# EAGLE board BRD Board G1 v63 (EAGLE 9.7.0), part 1 of 2
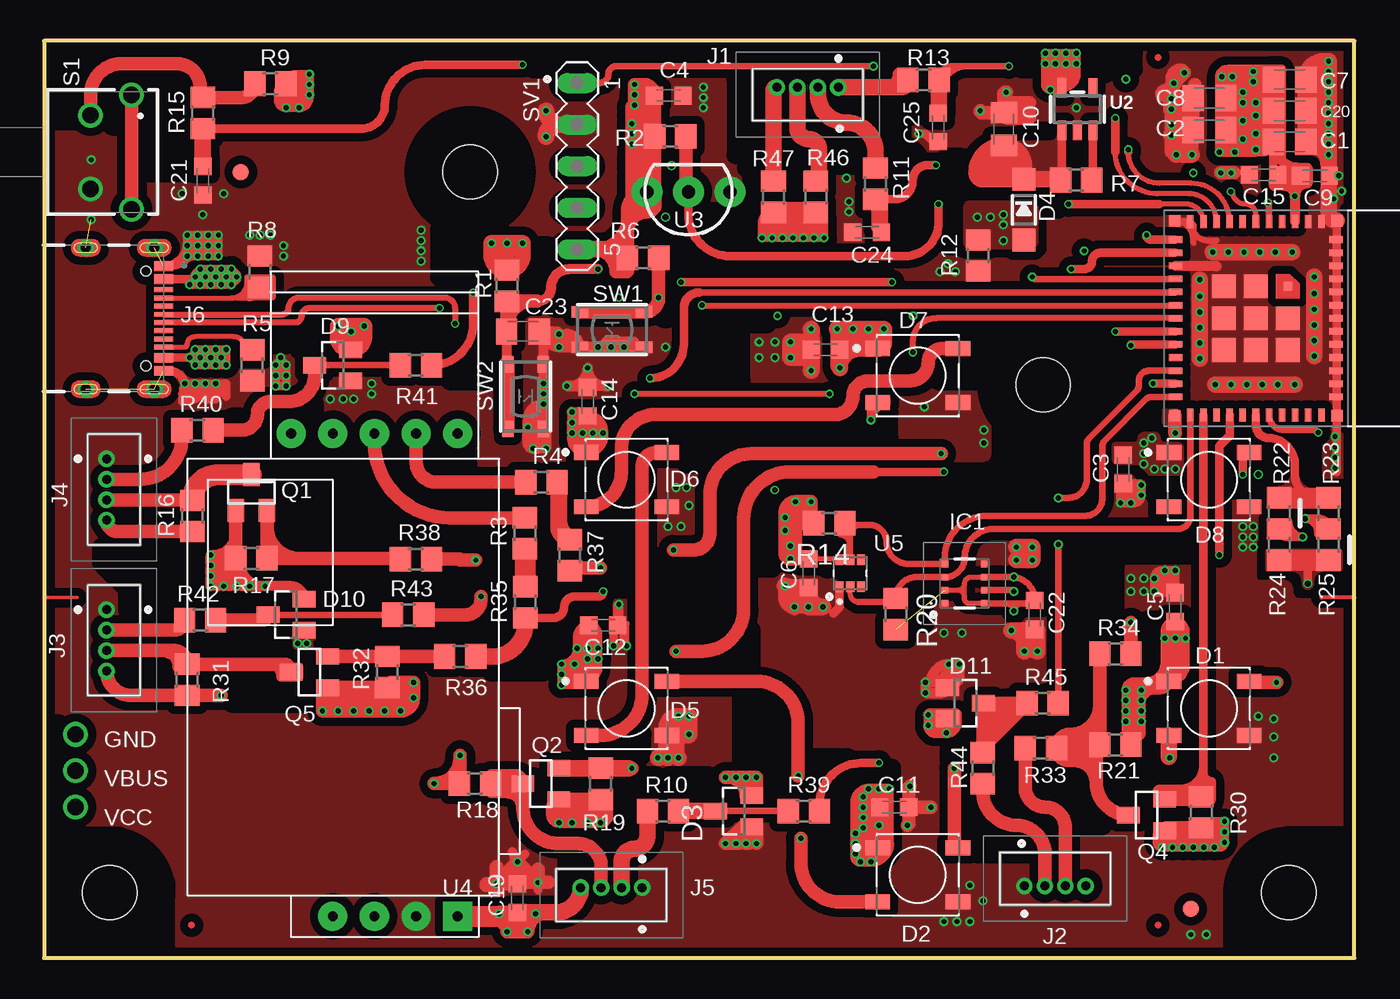
[diagram p0: board, top side]
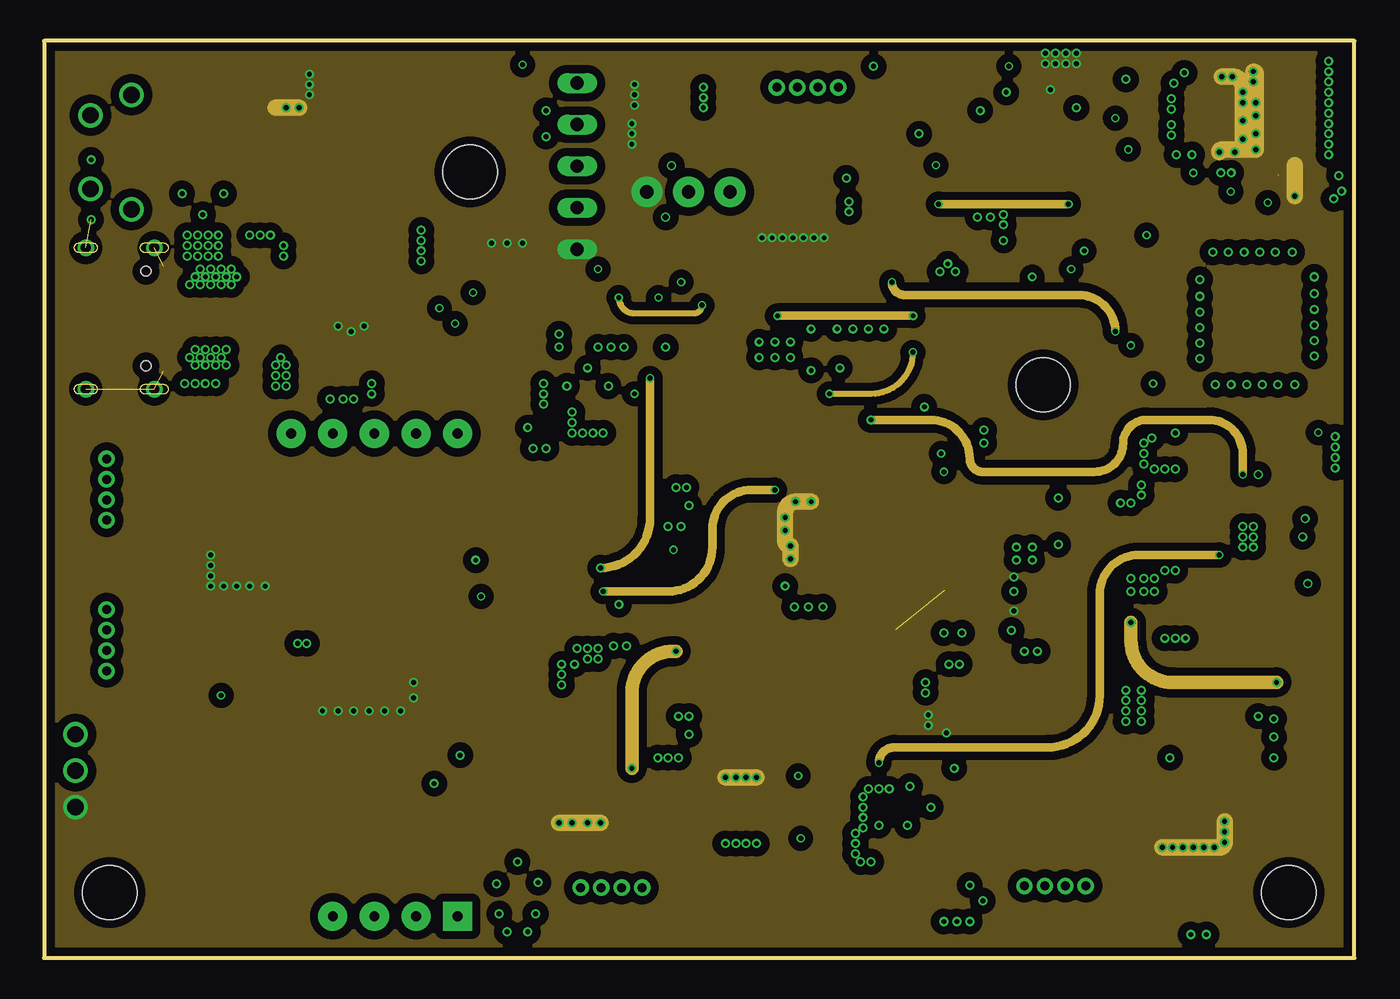
[diagram p1: board, inner layer Route2]
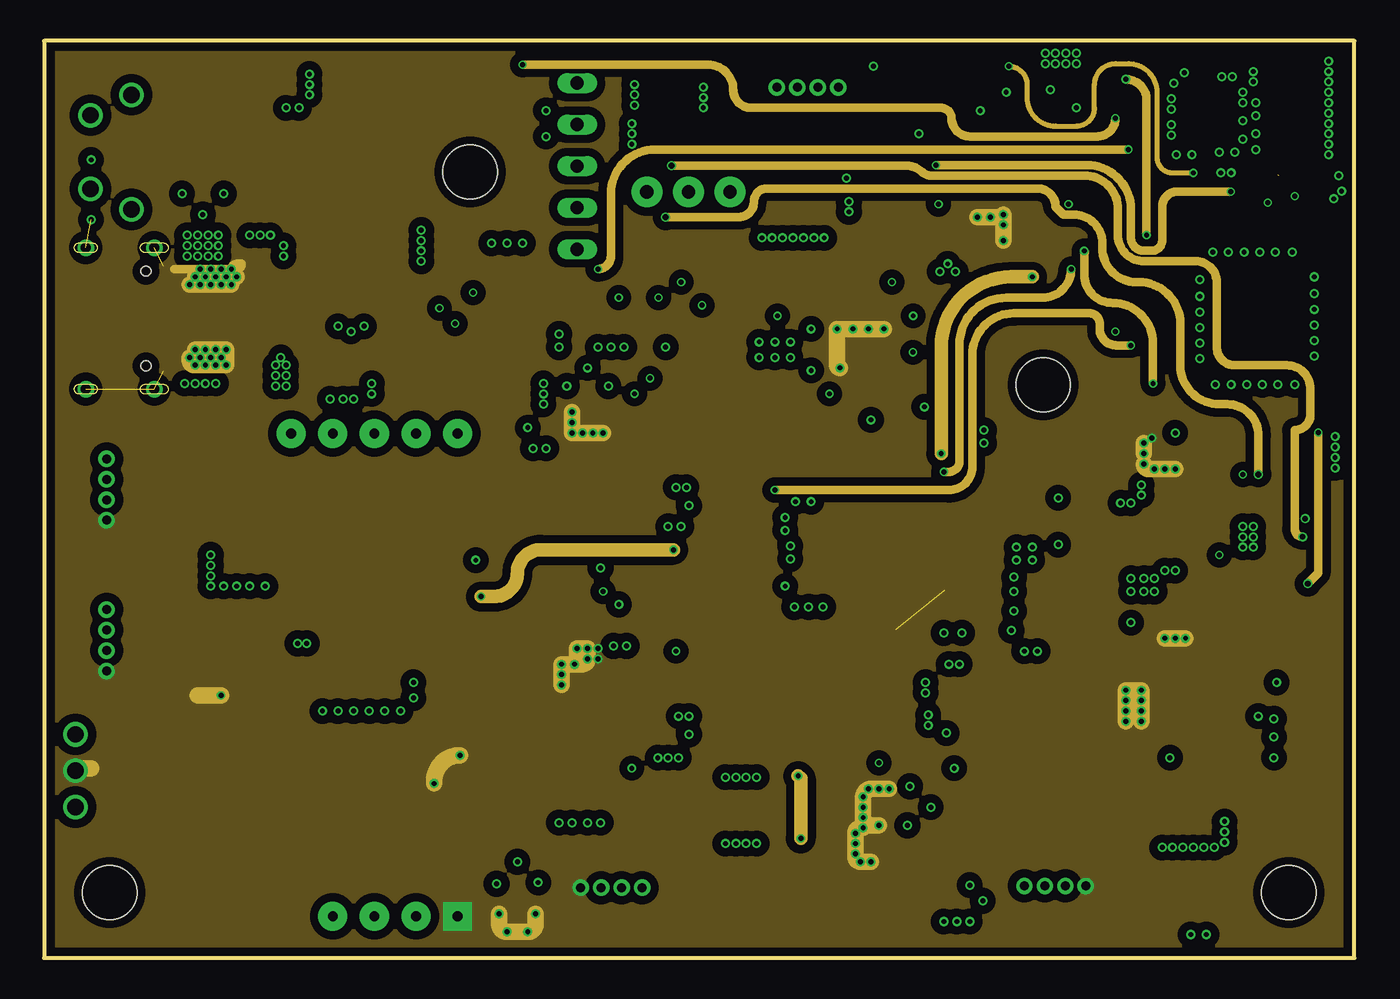
[diagram p2: board, inner layer Route15]
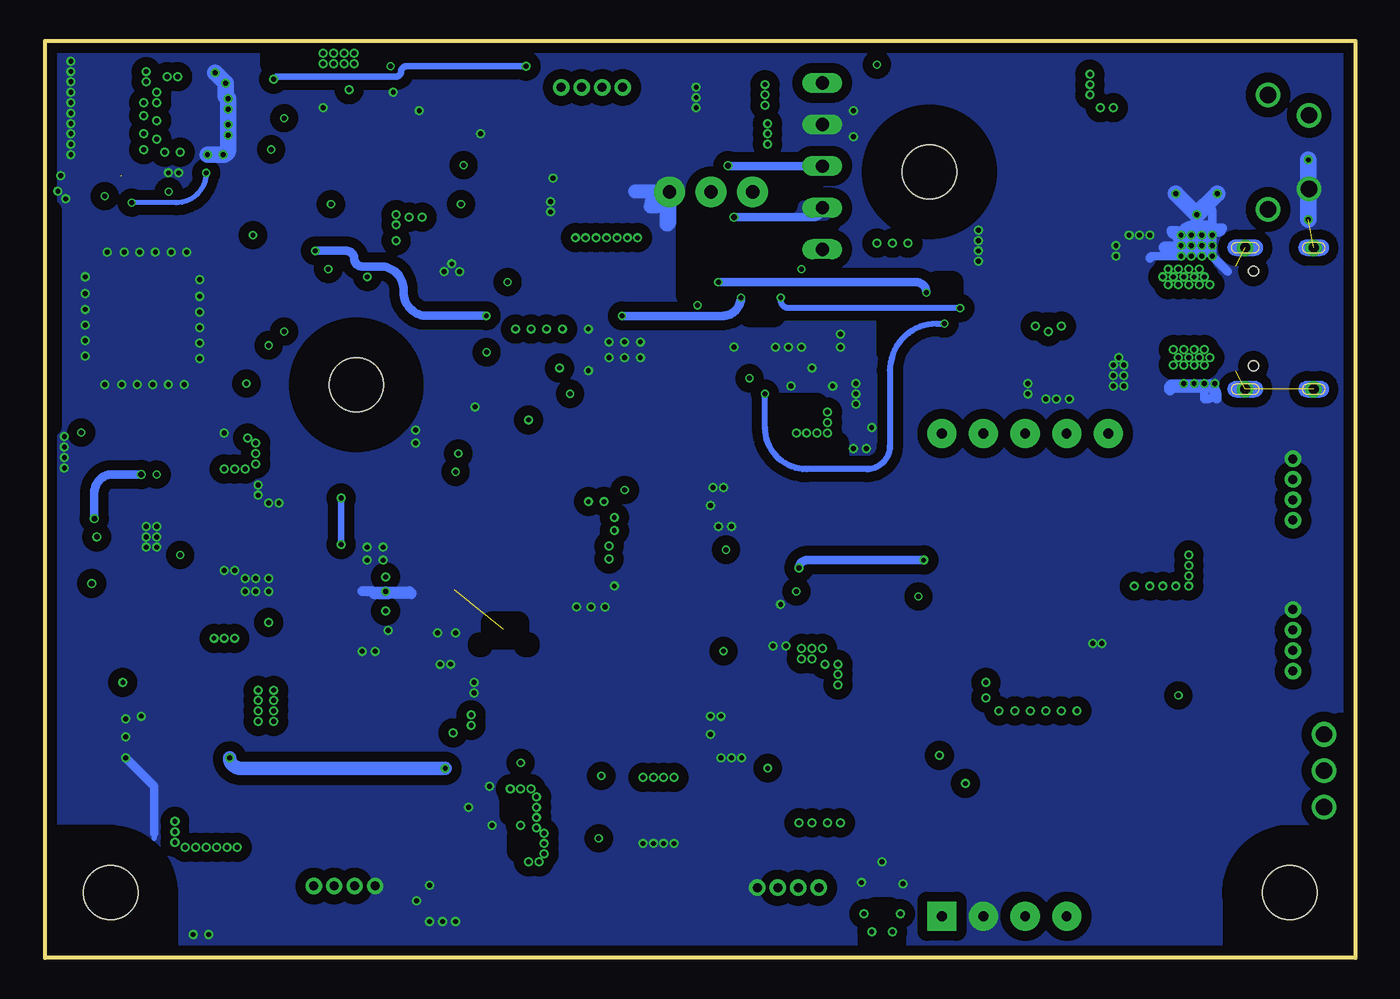
[diagram p3: board, bottom side, seen from below]

Size 80 x 56 mm. Coordinates in mm from the lower left corner, seen from the top.
Outline: 0,0 80,0 80,56 0,56 0,0
Copper layers (1+2*15+16): Top 0.018mm / dielectric 0.36mm / Route2 0.035mm / dielectric 0.71mm / Route15 0.035mm / dielectric 0.2mm / Bottom 0.018mm
Design rules "Multi-CB_4L_100µm-Tracks_OL35µm-IL35µm *": minimum track width 0.1mm, minimum drill 0.2mm, track to track 0.1mm, track to pad 0.1mm, pad to pad 0.1mm, via to via 0.1mm, smd to smd 0mil, copper to edge 0.2mm, drill to drill 0.2mm, minimum pad ring 0.125mm, minimum via ring 0.1mm, stop-mask expansion 2mil, vias tented up to drill 0.45mm, thermal gap 0.2mm
Net classes: 2 gnd: width 0.254 mm, drill 0.483 mm; 3 Power: width 0.305 mm, drill 0.483 mm
Holes 3.3 mm at 26,48 4,4 76,4 61,35
tRestrict: area 59.2,33.2 to 62.8,36.8; area 24.2,46.2 to 27.8,49.8; area 2.2,2.2 to 5.8,5.8; area 74.2,2.2 to 77.8,5.8; area 2.2,2.2 to 5.8,5.8; area 67.8,28.3 to 69.4,29.1; area 0.3,0.3 to 1.6,2.2; area 78.4,0.3 to 79.4,1.6; area 43.5,23.8 to 44.5,27.9; area 29.2,18.1 to 32.1,20.3; area 33,22.5 to 35.9,27.9; area 9.2,18.7 to 11.4,19.4; 87 more areas
bRestrict: area 24.2,46.2 to 27.8,49.8; area 2.2,2.2 to 5.8,5.8; area 59.2,33.2 to 62.8,36.8; area 74.2,2.2 to 77.8,5.8; area 0.3,0.3 to 1.6,2.2; area 78.4,0.3 to 79.4,1.6; area 35.5,39.2 to 37,40.3; area 28.4,37 to 28.6,39.1; area 24.6,40.5 to 25.6,41.3; area 50.8,8.7 to 51.7,9.8; area 50.6,6.5 to 51.1,7.5; area 51.1,19.5 to 52.7,20.5; 17 more areas

## Footprints (pad centres in the part's own frame; a part is rotated, then mirrored left to right if it is on the bottom)
C0805K = smd 1.3 x 1.6: 1 -1,0; 2 1,0
C0603K = smd 1.05 x 1.08: 1 -0.875,0; 2 0.875,0
WS2812B = smd 1.5 x 0.9: 1 -2.45,1.65; 2 -2.45,-1.65; 3 2.45,-1.65; 4 2.45,1.65
SOT23 = smd 1 x 1.4: 1 -0.95,-1.1; 2 0.95,-1.1; 3 0,1.1
SOD-123 = smd 1.4 x 1.4: A 1.85,0; C -1.85,0
BME688 = smd 0.4 x 0.4: 1 1.2,1.2; 2 1.2,0.4; 3 1.2,-0.4; 4 1.2,-1.2; 5 -1.2,-1.2; 6 -1.2,-0.4; 7 -1.2,0.4; 8 -1.2,1.2
530470410 = drill 0.55 pad 1: 1 0,0; 2 -1.25,0; 3 -2.5,0; 4 -3.75,0
GCT_USB4105-GF-A = smd 0.6 x 1.15: A1_B12 -3.2,4.755; A4_B9 -2.4,4.755; B1_A12 3.2,4.755; B4_A9 2.4,4.755 | smd 0.3 x 1.15: A5 -1.25,4.755; A6 -0.25,4.755; A7 0.25,4.755; A8 1.25,4.755; B5 1.75,4.755; B6 0.75,4.755; B7 -0.75,4.755; B8 -1.75,4.755 | drill 0.6 pad 1: SH1 -4.32,4.18; SH2 4.32,4.18; SH3 -4.32,0; SH4 4.32,0 | hole 0.6: 2.89,3.68; -2.89,3.68
R0805 = smd 1.3 x 1.5: 1 -0.95,0; 2 0.95,0
FIDU_1_3MM = smd 1 x 1: P$1 0,0
4312560587X6 = drill 1: 1 -3.5,1.25; 2 -2.25,-1.25; 3 2.25,-1.25; 4 3.5,1.25
MAR05-1 = drill 0.813 long: 1 -5.08,0; 2 -2.54,0; 3 0,0; 4 2.54,0; 5 5.08,0
BTN_RKB2_4.6X2.8 = smd 1 x 0.7: A 1.973,1.075; A' -1.973,1.075; B 1.973,-1.075; B' -1.973,-1.075
ESP32-PICO-MINI = smd 0.8 x 0.4: 1 -5.9,4; 2 -5.9,3.2; 3 -5.9,2.4; 4 -5.9,1.6; 5 -5.9,0.8; 6 -5.9,0; 7 -5.9,-0.8; 8 -5.9,-1.6; 9 -5.9,-2.4; 10 -5.9,-3.2; 11 -5.9,-4; 25 5.9,-4; 26 5.9,-3.2; 27 5.9,-2.4; 28 5.9,-1.6; 29 5.9,-0.8; 30 5.9,0; 31 5.9,0.8; 32 5.9,1.6; 33 5.9,2.4; 34 5.9,3.2; 35 5.9,4 | smd 0.4 x 0.8: 12 -4.8,-4.9; 13 -4,-4.9; 14 -3.2,-4.9; 15 -2.4,-4.9; 16 -1.6,-4.9; 17 -0.8,-4.9; 18 0,-4.9; 19 0.8,-4.9; 20 1.6,-4.9; 21 2.4,-4.9; 22 3.2,-4.9; 23 4,-4.9; 24 4.8,-4.9; 36 4.8,4.9; 37 4,4.9; 38 3.2,4.9; 39 2.4,4.9; 40 1.6,4.9; 41 0.8,4.9; 42 0,4.9; 43 -0.8,4.9; 44 -1.6,4.9; 45 -2.4,4.9; 46 -3.2,4.9; 47 -4,4.9; 48 -4.8,4.9 | smd 1.45 x 1.45: 49 0,0; 54 -1.95,0; 55 -1.95,-1.95; 56 0,-1.95; 57 1.95,-1.95; 58 1.95,0; 59 1.95,1.95; 60 0,1.95 | smd 0.7 x 0.7: 50 5.95,4.95; 51 5.95,-4.95; 52 -5.95,-4.95; 53 -5.95,4.95 | smd 0.5 x 0.5: 61 -1.95,1.95
SOT23-5 = smd 0.55 x 1.2: 1 -0.95,-1.3; 2 0,-1.3; 3 0.95,-1.3; 4 0.95,1.3; 5 -0.95,1.3
TO-92-AMMO = drill 0.813 pad 1.88: 1 -2.54,0; 2 0,0; 3 2.54,0
MH-Z19B = drill 0.6 pad 1.778: AOT 0,5.08; GND 0,2.54; HD 29.489,10.16; PWM 0,7.62; RX 29.489,2.54; SR 29.489,7.62; TX 29.489,5.08; VO 29.489,0 | drill 0.6 pad 1.778 square: VIN 0,0
XDCR_VEML6035 = smd 0.65 x 0.5: 1 -0.825,0.65; 2 -0.825,0; 3 -0.825,-0.65; 4 0.825,-0.65; 5 0.825,0; 6 0.825,0.65

## Placement (x,y rotation side)
C1  10uF  [C0805K]  76.04,49.83 0 top
C2  10uF  [C0805K]  71.15,50.55 180 top
C3  100nF  [C0603K]  65.88,29.83 270 top
C4  100nF  [C0603K]  38.13,52.66 180 top
C5  100nF  [C0603K]  69.06,21.43 90 top
C6  100nF  [C0603K]  46.67,23.5 270 top
C7  10uF  [C0805K]  76.04,53.64 0 top
C8  10uF  [C0805K]  71.15,52.5 180 top
C9  100nF  [C0603K]  77.58,47.77 0 top
C10  10uF  [C0805K]  58.59,50.62 90 top
C11  100nF  [C0603K]  51.91,9.21 0 top
C12  100nF  [C0603K]  34.13,20.32 0 top
C13  100nF  [C0603K]  47.72,37.15 180 top
C14  100nF  [C0603K]  33.18,33.97 90 top
C15  1uF  [C0603K]  74.46,47.81 180 top
C19  100nF  [C0603K]  28.89,3.65 90 top
C20  10uF  [C0805K]  76.04,51.73 0 top
C21  100nF  [C0603K]  9.68,47.47 270 top
C22  100nF  [C0603K]  60.48,20.95 90 top
C23  1uF  [C0805K]  29.23,38.26 0 top
C24  100nF  [C0603K]  50.24,44.31 180 top
C25  100nF  [C0603K]  54.58,50.72 270 top
D1  WS2812B  [WS2812B]  71.12,15.24 0 top
D2  WS2812B  [WS2812B]  53.34,5.08 0 top
D3  BAS40-04  [SOT23]  42.1,8.97 90 top
D4  MBR540  [SOD-123]  59.81,45.69 270 top
D5  WS2812B  [WS2812B]  35.56,15.24 0 top
D6  WS2812B  [WS2812B]  35.56,29.21 0 top
D7  WS2812B  [WS2812B]  53.34,35.56 0 top
D8  WS2812B  [WS2812B]  71.12,29.21 0 top
D9  BAS40-04  [SOT23]  17.62,36.2 90 top
D10  BAS40-04  [SOT23]  14.76,20.95 90 top
D11  BAS40-04  [SOT23]  56.24,15.56 270 top
IC1  BME688  [BME688]  56.2,22.86 180 top
J1  53047-0410  [530470410]  48.48,53.16 0 top
J2  53047-0410  [530470410]  59.85,4.4 180 top
J3  53047-0410  [530470410]  3.81,21.27 90 top
J4  53047-0410  [530470410]  3.81,30.48 90 top
J5  53047-0410  [530470410]  36.51,4.29 0 top
J6  USB4105-GF-A  [GCT_USB4105-GF-A]  2.54,39.05 270 top
Q1  BSS138  [SOT23]  12.65,28.42 0 top
Q2  BSS138  [SOT23]  30.32,10.64 90 top
Q4  BSS138  [SOT23]  67.31,8.73 90 top
Q5  BSS138  [SOT23]  16.19,17.46 90 top
R1  5.1K  [R0805]  28.26,41.05 90 top
R2  4k7  [R0805]  38.23,50.16 180 top
R3  330  [R0805]  29.35,25.93 90 top
R4  330  [R0805]  30.36,29.05 180 top
R5  5.1K  [R0805]  12.7,36.2 90 top
R6  100K  [R0805]  36.57,42.75 180 top
R7  100K  [R0805]  63.01,47.5 180 top
R8  5.1K  [R0805]  13.18,41.91 270 top
R9  10k  [R0805]  13.81,53.39 0 top
R10  1k  [R0805]  37.78,8.97 180 top
R11  100k  [R0805]  50.76,47.27 270 top
R12  100K  [R0805]  57.02,42.89 90 top
R13  100k  [R0805]  53.69,53.61 0 top
R14  4k7  [R0805]  47.94,26.55 180 top
R15  100k  [R0805]  9.68,51.59 90 top
R16  10k  [R0805]  9.05,26.99 270 top
R17  10k  [R0805]  12.65,24.4 180 top
R18  10k  [R0805]  26.3,10.65 180 top
R19  10k  [R0805]  33.97,10.64 270 top
R20  4k7  [R0805]  52,21 270 top
R21  10k  [R0805]  65.41,13.02 0 top
R22  !0  [R0805]  75.41,27.15 90 top
R23  0  [R0805]  78.42,27.15 270 top
R24  0  [R0805]  75.41,25.24 270 top
R25  !0  [R0805]  78.42,25.24 90 top
R30  10k  [R0805]  70.64,8.89 270 top
R31  10k  [R0805]  8.73,16.99 270 top
R32  10k  [R0805]  20.95,17.46 270 top
R33  0  [R0805]  60.85,12.81 180 top
R34  0  [R0805]  65.41,18.57 180 top
R35  0  [R0805]  29.37,21.72 90 top
R36  0  [R0805]  25.4,18.41 180 top
R37  0  [R0805]  32.09,24.59 90 top
R38  0  [R0805]  22.7,24.35 180 top
R39  330  [R0805]  46.39,8.97 180 top
R40  1k  [R0805]  9.37,32.23 180 top
R41  330  [R0805]  22.7,36.2 180 top
R42  1k  [R0805]  9.53,20.64 180 top
R43  330  [R0805]  22.23,20.95 180 top
R44  1k  [R0805]  57.31,11.59 270 top
R45  330  [R0805]  60.96,15.56 180 top
R46  10k  [R0805]  47.12,46.48 270 top
R47  10k  [R0805]  44.53,46.48 270 top
REF1  FIDUCIALFIDU_1_3_MM  [FIDU_1_3MM]  12,48 0 top
REF2  FIDUCIALFIDU_1_3_MM  [FIDU_1_3MM]  70,3 90 top
S1  431256058726  [4312560587X6]  4.08,49.21 270 top
SV1  THT Pin Header 5*1  [MAR05-1]  32.54,48.35 270 top
SW1  KMR2  [BTN_RKB2_4.6X2.8]  34.67,38.37 180 top
SW2  KMR2  [BTN_RKB2_4.6X2.8]  29.39,34.29 270 top
U1  ESP32-C6-MINI_MINI  [ESP32-PICO-MINI]  73.98,39.06 270 top
U2  AP2112/RT9080-3.3  [SOT23-5]  63.08,51.83 0 top
U3  DS18B20  [TO-92-AMMO]  39.34,46.78 180 top
U4  MH-Z19B  [MH-Z19B]  25.24,2.54 90 top
U5  VEML6035  [XDCR_VEML6035]  49.21,23.5 90 top

## Library data of the parts
C1-C15 C19-C25 = rcl; SPICEPREFIX: C
D1 D2 D5-D8 = LED; CATEGORY: LED; COLOR: RGB; DATASHEET: https://cdn-shop.adafruit.com/datasheets/WS2812B.pdf; DESCRIPTION: LED integrated light source; MANUFACTURER: Worldsemi; MPN: WS2812B; OPERATING_TEMPERATURE: -55°C ~ 150°C; PACKAGE_SIZE: 5050; PACKAGE_TYPE: SMD; PART_STATUS: ACTIVE; ROHS: COMPLIANT; SERIES: WS2812B; SUBCATEGORY: Chip LED Addressable; TYPE: Square with Flat Top
D3 D9-D11 = diode
D4 = microbuilder
IC1 = BME688; DESCRIPTION: Gas sensor measuring relative humidity, barometric pressure, ambient temperature and gas (VOC); HEIGHT: 1mm; MANUFACTURER_NAME: BOSCH; MANUFACTURER_PART_NUMBER: BME688; MOUSER_PART_NUMBER: 262-BME688; MOUSER_PRICE-STOCK: https://www.mouser.co.uk/ProductDetail/Bosch-Sensortec/BME688?qs=IS%252B4QmGtzzqQoVDscqwx3A%3D%3D
J1-J5 = 53047-0410; DESCRIPTION: Headers & Wire Housings VERTICAL HDR 4P; HEIGHT: 4.4mm; MANUFACTURER_NAME: Molex; MANUFACTURER_PART_NUMBER: 53047-0410; MOUSER_PART_NUMBER: 538-53047-0410; MOUSER_PRICE-STOCK: https://www.mouser.co.uk/ProductDetail/Molex/53047-0410?qs=DcEdecHHM4i8IPBxVAuJtg%3D%3D
J6 = USB4105-GF-A; AVAILABILITY: In Stock; CHECK_PRICES: https://www.snapeda.com/parts/USB4105-GF-A/Global+Connector+Technology/view-part/?ref=eda; DESCRIPTION: USB-C (USB TYPE-C) USB 2.0 Receptacle Connector 24 (16+8 Dummy) Position Surface Mount, Right Angle; Through Hole; MF: GCT; MP: USB4105-GF-A; PACKAGE: None; PRICE: None; SNAPEDA_LINK: https://www.snapeda.com/parts/USB4105-GF-A/Global+Connector+Technology/view-part/?ref=snap
Q1 Q2 Q4 Q5 = BeagleBone_Blue_R3; PROD_ID: TRANS-00830
R1-R25 R30-R47 = rcl; SPICEPREFIX: R
REF1 REF2 = Fiducial_Infolog
S1 = 431256058726; AVAILABILITY: In Stock; CHECK_PRICES: https://www.snapeda.com/parts/431256058716/W%25C3%25BCrth+Elektronik+Midcom/view-part/?ref=eda; DESCRIPTION: Tactile Switch SPST-NO Side Actuated Through Hole, Right Angle; MF: Würth Elektronik; MP: 431256058716; PACKAGE: None; PRICE: None; SNAPEDA_LINK: https://www.snapeda.com/parts/431256058716/W%25C3%25BCrth+Elektronik+Midcom/view-part/?ref=snap
SV1 = con-lstb; OC_FARNELL: unknown; OC_NEWARK: unknown
SW1 SW2 = adafruit_electromech
U1 = adafruit_wireless
U2 = adafruit_power; JLC_ROTATION: 0
U3 = SparkFun-Sensors; STORE_ID: SEN-00245
U4 = MH-Z19B; AVAILABILITY: Not in stock; CHECK_PRICES: https://www.snapeda.com/parts/MH-Z19B/Winsen/view-part/?ref=eda; DESCRIPTION: Intelligent Infrared CO2 Module; MF: Winsen; MP: MH-Z19B; PACKAGE: Package; PRICE: None; SNAPEDA_LINK: https://www.snapeda.com/parts/MH-Z19B/Winsen/view-part/?ref=snap
U5 = VEML6035; AVAILABILITY: In Stock; CHECK_PRICES: https://www.snapeda.com/parts/VEML6035/Vishay/view-part/?ref=eda; DESCRIPTION: Optical Sensor Ambient - I²C 6-SMD, No Lead; MF: Vishay Semiconductor Opto Division; MP: VEML6035; PACKAGE: SMD-6 Vishay Semiconductor Opto Division; PRICE: None; SNAPEDA_LINK: https://www.snapeda.com/parts/VEML6035/Vishay/view-part/?ref=snap

## Nets
ALL1-DIN-TRIGGER1: Q4.2 R30.1 U1.26
ALL2-RX-TRIGGER2: R35.1 R36.1 U1.20
ALL3-TX-TRIGGER3: R37.1 R38.1 U1.16
BOOT: R6.1 SW1.B SW1.B' U1.23
D+: J6.A6 U1.18
D-: J6.A7 U1.17
DATA-TEMP: R2.1 U1.10 U3.2
DIN1: D1.2 D2.4
DIN2: D2.2 D5.4
DIN3: D5.2 D6.4
DIN4: D6.2 D7.4
DIN5: D7.2 D8.4
EN: R7.1 U2.3
GND: C1.2 C2.2 C3.2 C4.1 C5.2 C6.2 C7.2 C8.2 C9.2 C10.2 C11.2 C12.2 C13.2 C14.2 C15.2 C19.2 C20.2 C21.2 C22.1 C23.2 C24.2 C25.2 D1.3 D2.3 D3.1 D5.3 D6.3 D7.3 D8.3 D9.1 D10.1 D11.1 IC1.1 IC1.5 IC1.7 J2.1 J3.1 J4.1 J5.1 J6.A1_B12 J6.B1_A12 J6.SH1 J6.SH2 J6.SH3 J6.SH4 R5.1 R8.1 R12.1 S1.3 SV1.2 SW1.A SW1.A' SW2.A SW2.A' U1.1 U1.2 U1.11 U1.14 U1.36 U1.37 U1.38 U1.39 U1.40 U1.41 U1.42 U1.43 U1.44 U1.45 U1.46 U1.47 U1.48 U1.49 U1.50 U1.51 U1.52 U1.53 U1.54 U1.55 U1.56 U1.57 U1.58 U1.59 U1.60 U1.61 U2.2 U3.1 U4.GND U5.1
HIGH-1-ECHO: J2.2 R44.2
HIGH-2-ECHO: J3.2 R42.2
HIGH-3-ECHO: J4.2 R40.2
HIGH-4-ECHO: J5.2 R10.2
IO0: SV1.1 U1.12
IO27: U1.27
IO29: U1.29
LED-DATA: D1.4 R34.1
LOW-1-ECHO: R45.1 U1.22
LOW-2-ECHO: R43.1 U1.15
LOW-3-ECHO: R41.1 U1.19
LOW-4-ECHO: R39.1 U1.28
N$1: R4.2 U4.RX
N$2: R9.1 R15.2 S1.2
N$3: R3.2 U4.TX
N$4: S1.1 S1.4
N$5: D3.3 R10.1 R39.2
N$6: D9.3 R40.1 R41.2
N$7: Q1.2 R17.1 R38.2
N$8: J6.A5 R8.2
N$9: J6.B5 R5.2
N$10: D10.3 R42.1 R43.2
N$11: D11.3 R44.1 R45.2
N$12: J1.3 R46.1
N$13: J1.4 R47.1
N$15: Q5.2 R32.1 R36.2
N$16: Q4.3 R21.1 R33.1 R34.2
N$17: J1.2 R11.1
N$19: J1.1 R13.1
REGENSENSOR-1: C24.1 R11.2 U1.6
REGENSENSOR-2: C25.1 R13.2 U1.5
RESET: C23.1 R1.1 SW2.B SW2.B' U1.8
RX: R22.2 R23.1 U1.30
RX-CO2: R4.1 R37.2
RX-VER: R23.2 R25.2 SV1.4
SCK: IC1.4 R14.1 U1.24 U5.5
SDI: IC1.3 R20.1 U1.25 U5.2
TASTER: C21.1 R15.1 U1.9
TRIG-1: J2.3 R33.2
TRIG-2: J3.3 Q5.3 R31.1
TRIG-3: J4.3 Q1.3 R16.1
TRIG-4: J5.3 Q2.3 R18.1
TRIGGER-4-3V3: Q2.2 R19.1 U1.13
TX: R24.2 R25.1 U1.31
TX-CO2: R3.1 R35.2
TX-VER: R22.1 R24.1 SV1.3
VBUS: C3.1 C5.1 C11.1 C12.1 C13.1 C14.1 C19.1 D1.1 D2.1 D4.A D5.1 D6.1 D7.1 D8.1 J2.4 J3.4 J4.4 J5.4 J6.A4_B9 J6.B4_A9 R12.2 R16.2 R18.2 R21.2 R31.2 U4.VIN
VCC: C1.1 C2.1 C4.2 C6.1 C7.1 C8.1 C9.1 C15.1 C20.1 C22.2 D3.2 D9.2 D10.2 D11.2 IC1.2 IC1.6 IC1.8 Q1.1 Q2.1 Q4.1 Q5.1 R1.2 R2.2 R6.2 R9.2 R14.2 R17.2 R19.2 R20.2 R30.2 R32.2 R46.2 R47.2 SV1.5 U1.3 U2.5 U3.3 U5.6
VHI: C10.1 D4.C R7.2 U2.1

## Tracks (layer width: path | path; a pad name or v marks a point on that pad's centre or on a via)
ALL1-DIN-TRIGGER1
  Top 0.508: U1.26 70.78,11.75 | 70.78,11.29 70.78,10.79 | 70.78,10.79 70.78,9.98 R30.1 69.83,9.84 | 70.78,11.75 arc-90 69.35,10.32 | Q4.2 arc-90 67.94,10.15 67.94,10.16 arc-90 68.1,10.32 69.35,10.32 | 69.69,9.68 arc-90 69.35,10.02 69.35,10.32 | 69.83,9.84 arc-90 69.35,10.32 | 69.83,9.84 arc-90 69.35,10.32 | 70.78,10.79 70.3,10.32 69.35,10.32 | 70.78,11.75 70.78,11.29 | 70.78,11.29 arc90 71.28,10.79 71.28,9.68 arc-90 71.12,9.53
  Top 0.813: Q4.2 69.69,9.68 70.48,9.68 arc90 R30.1
ALL2-RX-TRIGGER2  (via drill 0.3)
  Top 0.508: R35.1 31.09,20.77 arc90 31.75,21.43 arc-90 32.38,22.07 33.81,22.07 arc90 v34.13,22.38 | U1.20 66.36,37.47 v66.36,37.41
  Top 1.016: R36.1 27.6,18.41 arc90 R35.1
  Route2 0.508: v34.13,22.38 38.1,22.38 arc90 40.8,25.08 40.8,26.19 arc-90 43.18,28.57 v44.61,28.57
  Route15 0.508: v66.36,37.41 65.46,37.41 arc-90 64.45,38.42 64.45,38.73 arc90 63.82,39.37 59.21,39.37 arc90 56.67,36.83 56.67,30 arc-90 55.24,28.57 v44.61,28.57
ALL3-TX-TRIGGER3  (via drill 0.3, 0.3 pad 0.55)
  Top 0.406: U1.16 69.06,40.64 40.01,40.64
  Top 0.508: 40.01,40.64 arc90 39.05,39.69 39.05,37.47 arc-90 v36.99,35.4
  Top 0.813: R38.1 25.34,24.35 arc-90 25.4,24.29 v26.35,24.29 | R37.1 arc-90 32.26,23.81 v33.97,23.81
  Route2 0.508: v36.99,35.4 36.99,26.83 arc-90 v33.97,23.81
  Bottom 0.508: v26.35,24.29 33.5,24.29 arc-90 v33.97,23.81
BOOT  (via drill 0.3)
  Top 0.508: U1.23 67.73,35.06 arc90 v67.71,35.08
  Top 0.813: SW1.B SW1.B' arc90 v37.52,40.32 R6.1
  Route2 0.508: v53.06,39.21 v44.77,39.21 arc90 v44.77,39.21
  Route15 0.508: v67.71,35.08 67.71,37.54 arc90 65.25,40.01 arc-90 63.5,41.75 63.5,43.02 arc90 v63.5,43.18
  Bottom 0.508: v37.52,40.32 arc90 38.62,39.21 v44.77,39.21 | v53.06,39.21 56.67,39.21 arc90 58.1,40.64 58.1,40.8 arc-90 59.53,42.23 60.64,42.23 arc90 61.12,42.7 arc-90 61.59,43.18 v63.5,43.18
D+  (via drill 0.3)
  Top 0.356: U1.18 54.46,39.06 arc90 53.02,37.62 53.02,36.99 | v47.94,34.45 v36.04,34.45 | v25.08,38.73 25.08,39.69 arc90 24.45,40.32 15.56,40.32 arc90 14.92,39.69 arc-90 14.54,39.3 J6.A6
  Top 0.406: 53.02,36.99 v53.04,36.99
  Route2 0.356: v53.04,36.99 arc-90 50.5,34.45 v47.94,34.45
  Bottom 0.356: v25.08,38.73 25.56,38.73 arc-90 28.42,35.88 28.42,31.27 arc90 29.84,29.84 33.5,29.84 arc90 36.04,32.38 v36.04,34.45
D-  (via drill 0.3)
  Top 0.356: v40.16,39.85 40.32,39.85 69.06,39.85 arc90 U1.17 | v24.13,39.69 16.19,39.69 arc90 15.72,39.21 arc-90 15.31,38.8 J6.A7
  Route2 0.356: v35.08,40.32 arc90 36.04,39.37 39.69,39.37 arc90 40.16,39.85 v40.16,39.85
  Bottom 0.305: 35.08,40.16 v35.08,40.32
  Bottom 0.356: 35.08,40.16 arc-90 34.61,39.69 v24.13,39.69
DATA-TEMP  (via drill 0.3)
  Top 0.305: U1.10 arc90 69.71,46.04 68.1,46.04
  Top 0.508: 68.1,46.04 v62.55,46.04 | v54.61,46.04 54.61,44.93 arc-90 52.55,42.86 41.88,42.86 arc-90 39.34,45.4 U3.2
  Top 0.813: U3.2 arc-90 39.18,46.95 R2.1
  Route2 0.508: v54.61,46.04 v62.55,46.04
DIN1  (via drill 0.3 pad 0.55)
  Top 0.813: 68.67,12.29 arc90 v68.74,12.22 | v55.56,11.59 55.56,6.96 arc90 D2.4
  Top 1.016: D1.2 68.67,12.29
  Bottom 0.813: v55.56,11.59 68.1,11.59 arc90 v68.74,12.22
DIN2  (via drill 0.3)
  Top 0.813: D5.4 43.5,16.89 arc-90 46.04,14.35 v46.04,11.11 | v46.2,7.3 46.2,5.81 arc90 48.58,3.43 D2.2
  Route15 0.813: v46.04,11.11 46.2,10.95 v46.2,7.3
DIN3
  Top 0.813: D6.4 37.37,30.86 arc90 36.51,30 36.51,16.13 arc-90 33.97,13.59 D5.2
DIN4
  Top 0.813: D6.2 D6.2 arc90 35.24,29.69 35.24,31.11 arc-90 37.31,33.18 48.26,33.18 arc90 49.37,34.29 arc-90 50.32,35.24 52.86,35.24 arc90 53.98,36.35 arc-90 54.83,37.21 D7.4
DIN5  (via drill 0.3, 0.3 pad 0.55)
  Top 0.356: 50.48,33.5 arc-90 D7.2
  Top 0.508: D7.2 arc-90 51.11,34.13 51.44,34.13 51.44,33.81 arc90 v50.48,32.86 50.48,33.5 | v73.18,29.53 73.18,30.16 73.18,30.47 arc-90 D8.4
  Route2 0.508: v73.18,29.53 73.18,30.8 arc90 71.12,32.86 67.31,32.86 arc90 65.88,31.43 arc-90 64.14,29.69 57.31,29.69 arc-90 56.52,30.48 arc90 54.13,32.86 v50.48,32.86
EN
  Top 0.508: U2.3 64.03,48.9 64.03,47.56 arc-90 R7.1
GND  (via drill 0.3 pad 0.55)  (4 unrouted)
  Top 0.356: 35.08,20.4 35.56,20.4 v35.56,19.05 v34.77,19.05 | U1.11 69.98,45.02 U1.52 arc-90 70.17,43.88 | U1.11 70.17,44.78 70.17,43.88 | 70.17,43.66 70.17,43.88 | U1.11 arc90 71.13,43.81 71.6,43.81
  Top 0.406: 8.41,34.79 8.41,34.45 8.41,34.13 8.41,33.97 | IC1.7 59.14,22.46 arc-90 v59.21,22.38
  Top 0.508: v8.73,44.13 8.73,43.18 | 8.73,43.18 v8.73,42.86 v9.37,42.86 | v9.37,44.13 v9.37,42.86 | v10,44.13 v10,42.86 | 10.64,43.66 v10.64,44.13 v9.37,44.13 | 10.64,43.66 10.64,43.18 | 10.64,43.18 v10.64,42.86 v10,42.86 | v8.73,44.13 v9.37,44.13 | v8.73,43.5 8.89,43.66 10.64,43.66 | 8.73,43.18 10.64,43.18 | v66.36,27.78 v65.72,27.78 65.72,28.8 arc-90 C3.2 | v66.99,28.26 v66.99,28.89 arc90 66.93,28.96 C3.2 | v66.36,27.78 66.52,27.78 | 66.52,27.78 arc90 v66.99,28.26 | v66.36,27.78 arc-90 65.88,28.26 C3.2 | C3.2 66.29,28.96 arc-90 v66.99,28.26 | C3.2 arc-90 66.52,28.32 66.52,27.78 | C3.2 arc-90 66.36,28.48 v66.36,27.78 | v30.16,4.6 30.16,4.13 | 28.57,6.51 28.65,6.43 28.65,6.11 v28.89,5.87 | v28.89,5.87 29.21,6.19 | 29.21,6.19 29.37,6.35 | v28.89,5.87 arc-90 29.21,6.19 | v27.62,4.52 27.62,4.13 arc90 27.78,3.97 | v14.76,35.56 14.76,35.88 | v14.76,35.56 v14.13,35.56 | v14.76,35.56 v14.76,34.92 v14.13,34.92 v14.13,35.56 | v14.13,35.56 14.13,35.88 14.45,35.88 | 14.76,35.88 14.45,35.88 | v14.13,36.2 14.45,35.88 | v14.76,36.2 14.76,35.88 | v14.76,36.2 v14.13,36.2 | v14.76,36.2 14.45,36.51 | 14.45,36.51 v14.45,36.67 | v14.13,36.2 14.45,36.51 | v10.48,35.08 11.11,35.08 11.11,34.29 | v10.48,35.08 10.48,34.92 10.79,34.61 10.48,34.29 10.48,34.13 9.84,34.13 | v10.48,35.08 v9.84,35.08 | v9.84,35.08 10.16,34.77 10.16,34.61 | 9.84,34.13 9.53,34.45 9.21,34.13 | v9.84,35.08 9.53,34.77 | v9.84,35.08 9.84,34.13 | v8.57,35.08 9.21,34.45 | 9.21,34.45 9.21,34.29 | v9.21,35.08 9.21,34.45 | 8.89,34.61 8.57,34.92 | 8.57,34.92 v8.57,35.08 | 8.89,34.61 9.21,34.29 | 9.21,34.29 9.21,34.13 | 8.89,34.61 8.73,34.45 8.41,34.45 | 8.57,34.13 8.41,34.13 | 9.21,34.13 8.57,34.13
  Top 0.508: 8.57,34.13 8.41,33.97 | v8.57,35.08 v9.84,35.08 | 67.79,22.86 v67.79,22.38 arc90 67.86,22.31 | 67.79,22.86 v67.79,23.18 | v67.79,23.18 arc-90 68.26,23.65 v68.42,23.65 | v68.42,23.65 v69.06,23.65 69.06,23.18 | 69.06,23.18 69.06,22.86 | 69.06,22.86 C5.2 68.26,22.31 | 67.86,22.31 68.26,22.31 | v68.42,23.65 68.42,22.46 | 68.42,22.46 arc-90 68.26,22.31 | v67.79,23.18 69.06,23.18 | 67.79,22.86 68.1,22.86 | 69.06,22.86 68.1,22.86 | 68.1,22.86 arc90 67.86,22.62 | 68.1,22.86 arc90 67.86,22.62 | 67.86,22.62 67.86,22.31 | 68.42,22.46 arc-90 68.1,22.78 68.1,22.86 | C12.2 arc90 35.08,20.4 v35.08,21.59 arc90 35.01,21.51 C12.2 | v35.56,19.05 35.4,19.21 35.4,19.84 arc90 35.08,20.16 | v34.77,19.05 34.77,20.08 arc-90 C12.2 | U1.53 U1.50 78.93,29.72 arc-90 78.9,29.69 | C25.2 54.44,49.7 53.82,50.32 v53.42,50.32 | J6.B1_A12 7.64,35.85 arc-90 8.57,34.92 | v9.37,44.13 arc-90 7.49,42.25 J6.A1_B12 arc90 8.73,43.69 v8.73,44.13 | U5.1 48.56,21.42 48.18,21.03 | v10,42.86 v9.37,42.86
  Top 0.61: v30.48,33.81 v30.48,34.45 v30.48,35.08 arc-90 30.47,35.1 SW2.A' 30.47,38.02 arc90 C23.2 30.48,38.26 | v30.48,33.81 30.48,32.86 | 30.48,32.86 SW2.A | SW2.A arc-90 30.64,32.14 30.64,31.91 | 30.64,31.91 30.64,31.59 | 30.64,31.59 v30.64,31.11 v29.84,31.11 | 29.53,31.43 arc90 v29.84,31.11 | 29.53,31.43 29.53,32.07 | 29.53,32.07 v29.53,32.38 | v29.53,32.38 29.53,32.86 | 29.53,32.86 arc-90 v30.48,33.81 | 29.53,32.86 30.48,32.86 | v29.53,32.38 30.16,32.38 | 30.16,32.38 30.42,32.38 arc-90 SW2.A | 29.53,32.07 29.84,32.07 arc90 30.16,32.38 | 29.53,31.43 arc-90 30,31.91 | 30,31.91 30.64,31.91 | v29.84,31.11 30.16,31.11 arc90 30.64,31.59 | v29.84,31.11 arc90 30,31.27 | v29.84,31.11 arc90 30,31.27 | 30,31.27 30,31.91 | 31.27,38.26 arc-90 v31.43,38.1 | 30.96,38.26 31.27,38.26 | v31.43,38.1 arc90 31.27,38.26 | v31.43,38.1 31.43,37.78 | 31.43,37.78 v31.43,37.31 | v31.43,37.31 | v31.43,37.31 arc-90 30.48,38.26 | 30.48,38.26 30.96,38.26 | 30.96,38.26 arc-90 31.43,37.78 | 31.27,38.26 31.27,37.46 arc90 v31.43,37.31 | v31.43,38.1 30.64,38.1 arc-90 30.48,38.26 | v31.43,37.31 31.75,37.31 | 31.75,37.31 32.23,37.31 | 32.23,37.31 32.69,37.31 arc-90 SW1.A | v31.43,38.1 31.89,38.1 | SW1.A arc90 31.89,38.1 | v31.43,38.1 arc-90 32.23,37.31 | 31.89,38.1 arc90 31.75,37.96 31.75,37.31 | SW1.A' 35.41,37.3 arc-90 v35.4,37.31 v34.61,37.31 v33.81,37.31 32.71,37.31 arc90 SW1.A | C14.2 arc-90 33.26,34.92 v34.45,34.92 34.29,34.92 arc-90 v33.18,36.04 | C14.2 v33.18,36.04 | C14.2 arc90 33.1,34.92 v31.91,34.92 32.07,34.92 arc90 v33.18,36.04 | v71.83,47.94 v72.47,47.94 | 54.13,16.83 54.83,16.83 arc-90 D11.1 | D11.1 arc-90 54.83,16.19 v53.82,16.19 v53.82,16.83 54.13,16.83
  Top 0.61: v55.24,17.94 55.24,17.62 | 55.24,17.62 55.24,16.61 | 55.24,16.61 arc-90 D11.1 | 55.88,17.62 v55.88,17.94 v55.24,17.94 | 55.88,17.62 55.88,17.24 | 55.88,17.24 arc-90 55.24,16.61 | 55.88,17.24 55.62,17.24 arc-90 55.24,17.62 | 55.88,17.62 55.24,17.62 | v55.24,17.94 arc-90 54.13,16.83 | v55.24,17.94 arc90 54.13,16.83 | U1.14 71.56,42.27 arc-90 71.6,42.23 | 35.08,37.62 34.29,37.62 | 36.04,37.62 35.24,37.62
  Top 0.813: C10.2 57.29,51.62 arc-90 v57.15,51.75 | C10.2 58.59,51.75 | 58.59,51.75 58.59,52.72 arc-90 v58.74,52.86 | 60.17,51.75 58.59,51.75 | 60.17,52.23 59.07,52.23 arc90 58.59,51.75 | 60.17,51.28 58.93,51.28 arc-90 C10.2 | D3.1 arc-90 42.17,6.99 | 42.17,6.99 v41.59,6.99 42.63,8.02 D3.1 | D3.1 arc-90 42.17,6.99 | D3.1 43.2,7.32 arc-90 v42.86,6.99 | D3.1 43.5,8.02 v43.5,6.99 | v52.7,8.1 52.79,8.18 C11.2 | C11.2 52.79,10.4 v52.86,10.48 | C11.2 v54.13,9.21 | v69.06,32.07 arc-90 69.03,32.09 U1.51 | v28.89,5.87 C19.2 | C19.2 v27.62,4.53 | v27.62,4.53 arc-90 v27.62,4.52 | v30.16,4.6 28.97,4.6 arc90 C19.2 | v27.62,4.52 27.07,4.52 arc90 26.99,4.45 27.54,4.45 arc90 v27.62,4.53 | v27.62,4.52 27.62,5.56 | 30.8,4.6 v30.16,4.6 | 30.16,5.4 v30.16,4.6 | v28.89,5.87 27.62,4.6 v27.62,4.52 | v28.89,5.87 v30.16,4.6 | v71.83,47.94 72.63,47.94 | v69.61,54.05 v68.98,53.42 68.34,52.78 | v68.82,51.83 68.82,51.59 | 68.82,51.59 v68.82,50.88 | v68.82,50.88 v68.82,50.24 | 69.84,50.24 arc90 C2.2 | 70.15,51.59 C8.2 arc90 70.25,52.6 | 70.25,53.34 70.25,52.6 | v68.82,52.47 arc90 68.96,52.6 70.25,52.6 | 68.82,51.59 70.15,51.59 | v68.82,50.88 69.82,50.88 | 69.82,50.88 69.5,51.2 arc90 69.37,51.07 69.37,50.24 | 69.82,50.88 arc-90 C2.2 | v68.82,50.24 69.37,50.24 | 69.37,50.24 69.84,50.24 | 69.84,50.24 arc90 C2.2 | C2.2 70.15,51.59 | v69.14,49.05 arc-90 68.82,49.37 v68.82,50.24 | v69.14,49.05 69.14,49.54 arc-90 69.84,50.24 | v70.09,49.05 70.09,50 arc90 69.84,50.24 | 69.84,50.24 arc90 69.53,49.94 69.53,49.05 v69.14,49.05 | v45.8,21.43 arc-90 45.24,21.99 v45.24,22.7 46.04,22.7 | 46.04,22.7 46.59,22.7 arc-90 C6.2 | v45.8,21.43 arc90 46.67,22.3 arc90 v47.55,21.43 | v45.8,21.43 arc90 46.04,21.67 46.04,22.7
  Top 0.813: v45.8,21.43 v46.67,21.43
  Top 1.016: v30.64,51.75 arc90 31.5,50.89 SV1.2 31.37,50.89 arc90 v30.64,50.16 | 78.42,53.82 78.42,51.73 | 78.42,51.73 78.42,51.12 | 78.42,51.12 78.42,50.35 | 78.42,49.83 78.42,48.45 | 78.42,47.77 C9.2 | 77.81,51.73 78.42,51.73 | C1.2 78.42,49.83 | C1.2 C20.2 | C20.2 C7.2 | C7.2 77.04,53.82 78.42,53.82 | C7.2 arc-90 78.17,54.77 v78.42,54.77 78.42,53.82 | v78.42,49.69 arc-90 77.04,51.07 | C20.2 77.04,51.07 | C20.2 arc-90 78.42,50.35 | 78.42,50.35 78.42,49.83 | C20.2 arc-90 78.42,50.35 | 77.04,51.07 arc90 77.76,50.35 78.23,50.35 | C20.2 arc-90 78.42,50.35 | 77.81,51.73 arc-90 78.42,51.12 | C20.2 77.81,51.73 | 77.81,51.73 arc-90 78.42,51.12 | C20.2 arc-90 77.63,51.15 77.63,50.96 arc90 78.23,50.35 | 78.23,50.35 78.42,50.35 | C7.2 arc-90 77.81,52.88 77.81,51.73 | C1.2 arc-90 78.42,48.45 | 78.42,48.45 78.42,47.77 | U1.53 arc-90 78.42,45.52 78.42,47.77 | v46.83,38.42 arc-90 46.84,38.4 C13.2 | C13.2 46.84,36.67 | 46.84,36.67 46.84,35.89 arc-90 v46.83,35.88 | C13.2 arc90 46.37,37.62 v45.56,37.62 v45.56,36.67 46.84,36.67 | v70.09,49.05 69.53,49.05 | v69.14,49.05 69.14,49.93 arc90 v68.82,50.24 | 68.34,52.78 68.42,52.86 v68.82,52.47 v68.82,51.83 | v68.98,53.42 68.98,53.69 arc-90 69.42,54.13 | v70.56,41.43 v70.56,40.4 v70.56,36.59 | v71.52,35 v76.36,35 | v77.55,36.75 v77.55,41.59 | v76.2,43.1 v71.36,43.1 | v59.85,18.73 59.85,19.21 arc90 v59.05,20 60.41,20 arc90 C22.1 | C22.1 60.48,18.89 arc90 v60.64,18.73 60.64,19.92 arc90 C22.1 | v59.37,25.08 v60.33,25.08 v60.33,24.29 v59.37,24.29 | v45.24,22.7 arc-90 45.8,22.15 v45.8,21.43 | v46.67,21.43 v47.55,21.43 arc-90 46.67,22.3 C6.2 | v38.73,14.76 v39.37,14.76 v39.37,13.65 arc-90 39.31,13.59 38.58,13.59
  Top 1.016: 38.58,13.59 D5.3 | v38.73,14.76 38.73,13.75 arc-90 38.58,13.59 | D5.3 38.01,14.04 arc-90 v38.73,14.76 | D5.3 38.01,12.77 arc-90 v37.47,12.22 | v38.1,12.22 arc-90 38.01,12.31 D5.3 | v38.73,12.22 arc-90 38.58,12.38 38.58,13.59
  Bottom 0.305: 73.34,7.62 73.34,7.3
  Bottom 0.508: v8.73,44.13 v8.73,43.5 | v10.64,43.5 v10,43.5 | v10,43.5 v9.37,43.5 | v9.37,43.5 v8.73,43.5 | v8.73,44.13 9.05,44.13 | 9.05,44.13 v9.37,44.13 | v9.37,44.13 v9.37,43.5 | v9.37,43.5 v9.37,42.86 | v10,43.5 v10,42.86 v10.64,43.5 | v10,43.5 v10,44.13 | v10,44.13 v9.37,44.13 | v8.73,44.13 v9.37,43.5 | v9.37,43.5 v10,44.13 | v10,44.13 v10.64,43.5 | v10,44.13 v10.64,44.13 | v10.64,44.13 10.64,43.81 | v10.64,42.86 v10.64,43.5 | v10,43.5 v9.37,42.86 | v9.37,42.86 v8.73,43.5 | v8.73,43.5 v8.73,42.86 7.78,41.91 | v10,44.13 9.68,44.45 v9.68,45.4 | v8.73,44.13 8.73,44.29 | 8.73,44.29 8.73,44.77 | 8.73,44.77 8.73,45.56 arc-90 9.13,45.96 | v9.37,44.13 arc-90 8.73,44.77 | 8.73,44.77 9.21,44.77 | 9.21,44.77 10,44.77 | v10.64,44.13 arc90 10,44.77 | 9.05,44.13 9.05,44.61 arc-90 9.21,44.77 | v9.37,44.13 arc-90 10,44.77 | 10,44.77 v10,44.13 | 10,44.77 arc90 v10.64,44.13 | v10.64,44.13 arc-90 10.95,44.45 11.27,44.45 arc-90 10.95,44.13 | 10.95,44.13 v10.64,44.13 | v10.64,43.5 10.64,43.81 | 10.64,43.81 arc-90 10.95,44.13 | v10.64,43.5 11.59,43.5 arc-90 11.75,43.34 11.11,43.34 | 11.11,43.34 arc-90 10.64,43.81 | 10.64,43.81 arc90 10.95,44.13 | v10.64,42.86 arc-90 11.11,43.34 | v10.64,42.86 arc-90 11.11,43.34 | v10.64,42.86 12.38,42.86 arc-90 12.54,42.7 | v8.73,44.13 arc90 8.26,44.61 8.1,44.61 arc90 8.41,44.29 8.73,44.29 | v9.21,35.08 v8.57,35.08 8.57,34.61 | v9.21,35.08 v9.84,35.08 v10.48,35.08 11.11,35.08 arc-90 11.43,34.77 arc-90 11.27,34.61 arc90 11.11,34.77 9.21,34.77 | 8.57,34.61 8.57,34.29 arc-90 8.41,34.13 8.41,34.29 arc-90 v9.21,35.08 | v9.21,35.08 9.21,34.77 | 9.21,34.77 9.21,34.13 9.05,34.13 arc-90 8.57,34.61 | 8.57,34.61 arc-90 8.73,34.77 9.21,34.77
  Bottom 0.508: v75.09,12.22 73.34,10.48 73.34,7.62
  Bottom 0.61: v59.21,22.38 57.78,22.38 arc90 57.63,22.23 59.05,22.23 | 59.05,22.23 arc90 v59.21,22.38 | 60.01,22.38 60.64,22.38 | 60.01,22.38 v59.21,22.38 | 60.01,22.38 arc-90 59.85,22.23 59.05,22.23
  Bottom 0.813: U3.1 arc-90 41.93,46.83 43.97,46.83 arc-90 43.93,46.78 U3.1 | U3.1 41.88,44.96 arc90 42.07,44.77 42.07,46.59 | 42.07,46.59 arc90 U3.1 | U3.1 42.12,46.78 arc-90 43.02,45.88 42.78,45.88 arc-90 42.07,46.59
  Bottom 1.016: v10.95,46.67 v9.68,45.4 9.13,45.96 v8.41,46.67 | v2.86,48.74 v2.86,45.09 | v69.61,54.05 v68.98,53.42 68.98,52.63 v68.82,52.47 v68.82,50.24 68.82,49.37 arc90 v69.14,49.05 v70.09,49.05
  other vias: 78.42,52.86 78.42,49.05 63.02,51.91 78.74,46.35 79.06,47.78 79.22,46.83 56.52,4.45 57.31,3.49 55.72,2.22 56.52,2.22 54.93,2.22 54.93,19.84 56.04,19.84 75.09,13.49 75.09,14.61 74.14,14.76 42.23,6.99 75.17,43.1 74.22,43.1 73.26,43.1 72.31,43.1 75.33,35 74.37,35 73.42,35 72.47,35 70.56,39.45 70.56,38.5 70.56,37.54 77.55,40.56 77.55,39.61 77.55,38.66 77.55,37.7 38.89,26.35 38.58,28.73 39.21,28.73 39.37,27.62 38.1,26.35 17.46,34.13 18.26,34.13 18.89,34.13 20,34.45 20,35.08 14.61,42.86 14.61,43.5 13.18,44.13 13.81,44.13 12.54,44.13 55.17,42.39 55.64,41.91 54.69,41.91 15.48,19.21 16.03,19.21 78.42,50.32 78.42,50.96 78.42,51.59 78.42,52.23 78.42,53.5 78.42,54.13 57.39,32.23 57.39,31.43 53.74,33.66 49.13,45.56 49.13,46.2 44.61,37.62 44.61,36.67 43.66,37.62 43.66,36.67 37.94,37.31 23.02,44.45 23.02,43.81 23.02,43.18 23.02,42.55 40.24,53.18 40.24,52.55 40.24,51.91 48.97,47.62 67.15,23.18 67.15,22.38 66.36,22.38 66.36,23.18 70.96,1.43 70.01,1.43 78.82,31.83 78.82,31.19 78.82,30.56 78.82,29.92 73.18,26.35 73.82,26.35 73.18,25.72 73.82,25.72 73.18,25.08 73.82,25.08
  pour Bottom (isolate 0.61, rank 2, no thermals): 0,0 80,0 80,56 0,56
  pour Top (isolate 0.508, rank 2, no thermals): 0,0 80,0 80,56 0,56
  pour Top (no thermals): 15.4,18.89 16.19,18.89 16.23,18.9 16.27,18.91 16.3,18.94 16.33,18.97 16.35,19.01 16.35,19.05 16.35,19.35 16.35,19.36 16.35,19.37 16.35,19.38 16.35,19.38 16.35,19.39 16.35,19.4 16.36,19.41 16.36,19.41 16.36,19.42 16.37,19.43 16.37,19.44 16.37,19.45 16.37,19.45 16.38,19.46 16.39,19.47 16.39,19.48 16.4,19.48 16.4,19.48 16.41,19.49 16.42,19.5 16.43,19.5 16.43,19.5 16.43,19.51 16.44,19.51 16.46,19.52 16.46,19.52 16.47,19.52 16.47,19.52 16.48,19.52 16.51,19.53 16.51,20.16 15.24,20.16 15.24,19.05 15.25,19.01 15.26,18.97 15.29,18.94 15.32,18.91 15.36,18.9
HIGH-1-ECHO
  Top 0.813: J2.2 61.1,6.37 arc90 59.37,8.1 arc-90 57.31,10.16 R44.2
HIGH-2-ECHO
  Top 0.813: J3.2 6.99,20.02 7.32,20.02 7.96,20.02 arc90 R42.2
HIGH-3-ECHO
  Top 0.813: J4.2 5.88,29.23 arc90 8.42,31.77 R40.2
HIGH-4-ECHO
  Top 1.016: J5.2 35.26,5.89 arc-90 36.04,6.67 arc90 36.83,7.46 R10.2
IO0  (via drill 0.3, 0.3 pad 0.55)
  Top 0.406: SV1.1 33.91,53.43 arc90 34.45,53.98 arc-90 34.92,54.45 v50.64,54.45
  Top 0.508: U1.12 67.49,43.87 67.31,44.05 v67.31,44.13
  Route15 0.508: v67.31,44.13 67.31,52.39 arc90 v66.04,53.66
  Bottom 0.406: v50.64,54.45 57.94,54.45 arc-90 58.26,54.13 arc90 58.58,53.82 65.88,53.82 v66.04,53.66
LED-DATA  (via drill 0.3 pad 0.55)
  Top 0.813: R34.1 v66.36,20.48 | v75.25,16.83 73.63,16.83 arc-90 D1.4
  Route2 0.813: v66.36,20.48 66.36,19.37 arc90 68.9,16.83 v75.25,16.83
LOW-1-ECHO  (via drill 0.3 pad 0.55)
  Top 0.406: R45.1 v61.91,25.24 arc-90 v61.91,25.24 | v61.91,28.1 62.55,28.1 arc90 63.66,29.21 63.66,31.38 arc-45 63.81,31.74 66.69,34.62 arc45 66.83,34.98 66.83,35.24 arc-90 67.46,35.87 67.79,35.87 U1.22
  Bottom 0.406: v61.91,25.24 v61.91,28.1
LOW-2-ECHO  (via drill 0.3)
  Top 0.406: U1.15 60.45,41.47 v60.33,41.59
  Top 0.813: R43.1 25.72,20.95 arc90 26.67,21.91 v26.67,22.07 | v38.42,24.92 39.69,24.92 arc90 40.64,25.88 40.64,28.26 arc-90 43.18,30.8 v54.77,30.8
  Route15 0.813: v26.67,22.07 27.46,22.07 arc90 28.89,23.5 arc-90 30.32,24.92 v38.42,24.92 | v54.77,30.8 54.77,37.31 arc-90 59.05,41.59 v60.33,41.59
LOW-3-ECHO  (via drill 0.3)
  Top 0.508: R41.1 R41.1 arc90 26.19,38.73 v26.19,40.64 | v65.41,38.26 U1.19 arc90 U1.19 | v51.75,41.27 v38.89,41.27
  Route2 0.508: v65.41,38.26 arc90 63.18,40.48 52.55,40.48 arc-90 v51.75,41.27
  Bottom 0.508: v26.19,40.64 arc-90 26.83,41.27 v38.89,41.27
LOW-4-ECHO  (via drill 0.3)
  Top 0.508: R39.1 47.34,9.37 arc-90 49.88,11.91 v50.96,11.91 | U1.28 72.38,31.9 71.75,31.27 71.75,26.51 71.76,26.51 v71.74,24.62 v71.75,24.61
  Route2 0.508: v50.96,11.91 arc-90 51.91,12.86 61.28,12.86 arc90 64.45,16.03 64.45,22.23 arc-90 66.83,24.61 v71.75,24.61
N$1
  Top 0.813: R4.2 23.97,29.05 arc-90 22.7,30.32 U4.RX
N$2
  Top 0.813: S1.2 2.83,52.7 arc-90 4.74,54.61 8.1,54.61 arc-90 9.53,53.18 9.53,52.7 arc90 R15.2 12.02,52.54 arc90 R9.1
N$3
  Top 0.813: U4.TX 20.16,31.48 arc90 24.77,26.88 R3.2
N$4
  Top 0.813: S1.1 S1.4
N$5
  Top 0.406: R39.2 D3.3
  Top 1.016: D3.3 R10.1
N$6
  Top 0.406: D9.3 R41.2
  Top 0.813: R40.1 12.06,32.23 arc90 13.02,33.18 arc-90 13.81,33.97 14.92,33.97 arc90 16.52,35.57 D9.3
N$7
  Top 0.813: 13.6,25.56 Q1.2 13.6,26.36 arc90 15.56,24.4 | 13.6,25.56 R17.1 14.76,24.4 | 14.76,24.4 15.56,24.4 | 15.56,24.4 21.7,24.4 arc-90 R38.2 | 14.76,24.4 arc-90 13.6,25.56
N$8
  Top 0.305: J6.A5 11.43,40.3 | 11.73,40.3 12.52,40.3 | 12.52,40.3 R8.2 | 11.73,40.3 11.43,40.3 | 11.73,40.3 arc90 12.7,41.27 | 11.43,40.3 arc90 12.38,41.26 12.38,41.59 13.97,41.59 13.97,40.32 arc-90 13.95,40.3 12.52,40.3
  Top 0.406: 12.52,40.3 arc90 R8.2
N$9
  Top 0.305: 12.22,37.3 arc90 11.59,37.94 9.21,37.94 arc90 8.73,37.47 arc-90 8.57,37.3 J6.B5
  Top 0.406: R5.2 12.54,37.3 arc90 12.22,37.3
N$10
  Top 0.406: D10.3 R43.2
  Top 0.813: 13.35,20.64 arc90 D10.3 arc-90 13.35,20.64 | R42.1 13.35,20.64
N$11
  Top 0.813: R44.1 57.31,13.97 | 57.31,13.97 57.31,15.52 D11.3 | D11.3 58.9,15.56 | 58.9,15.56 R45.2 | R45.2 57.31,12.86 R44.1 | 58.9,15.56 58.02,14.68 | 58.02,14.68 57.31,13.97 | D11.3 57.34,15.36 58.02,14.68 | R44.1 57.31,13.02 arc-90 59.85,15.56 R45.2
N$12
  Top 0.813: R46.1 arc90 47.15,47.46 47.15,47.78 47.31,47.94
  Top 1.016: J1.3 45.98,50.69 arc90 46.67,50.01 arc-90 47.31,49.37 47.31,47.94
N$13
  Top 1.016: J1.4 arc90 44.53,52.96 R47.1
N$14  (via drill 1 pad 1)
  other vias: 1.91,13.65
N$15
  Top 0.813: Q5.2 R32.1 | R32.1 arc-90 R32.1 | R32.1 arc-90 R32.1 | R32.1 R36.2
N$16
  Top 0.813: 64.45,13.65 R21.1 arc-90 64.25,12.81 64.25,12.22 | 64.45,13.65 64.45,15.08 | 64.45,15.08 64.45,15.47 | 64.45,15.47 R34.2 | Q4.3 arc-90 64.25,10.69 | 64.25,10.69 64.25,12.22 | R33.1 62.13,12.81 arc-90 64.25,10.69 | R33.1 62.19,12.81 arc90 64.45,15.08 | R33.1 arc-90 62.64,13.65 | 62.64,13.65 64.45,13.65 | 62.64,13.65 arc90 64.45,15.47 | R33.1 arc90 62.55,12.06 62.88,12.06 | 64.25,12.22 arc-90 64.09,12.06 62.88,12.06 | 62.88,12.06 arc-90 64.25,10.69
  Top 1.016: R33.1 64.25,12.81
N$17
  Top 1.016: J1.2 47.23,52.77 arc90 49,51 arc-90 50.76,49.24 R11.1
N$19
  Top 0.406: 52.23,53.98 arc-90 51.42,53.16
  Top 0.813: 51.28,53.16 51.42,53.16 arc90 52.23,53.98
  Top 1.016: J1.1 50.64,53.16 51.28,53.16 52.3,53.16 arc90 R13.1
REGENSENSOR-1  (via drill 0.3)
  Top 0.305: U1.6 73.98,45.4 arc90 73.34,46.04 arc-90 72.55,46.83 72.55,46.8 v72.46,46.8
  Top 0.508: v54.45,48.42 53.98,48.42 arc90 53.02,47.47 arc-90 51.88,46.33 R11.2 50.76,44.68 arc90 C24.1
  Top 0.813: R11.2 51.12,45.96 C24.1
  Route15 0.508: v72.46,46.8 69.19,46.8 arc90 68.26,45.88 68.26,43.81 arc-90 67.63,43.18 67.15,43.18 arc-90 66.36,43.97 66.36,45.72 arc90 63.66,48.42 v54.45,48.42
REGENSENSOR-2  (via drill 0.3)
  Top 0.406: U1.5 74.78,46.19 arc90 74.77,46.2 arc90 74.71,46.14 v74.71,46.12 | 56.04,54.45 55.72,54.45 55.48,54.45 arc90 R13.2 | 56.04,54.45 56.36,54.45 | 56.36,54.45 v58.9,54.45 | 56.04,54.45 arc90 54.64,53.05 54.64,52.86 | 56.36,54.45 arc90 54.64,52.74 54.64,51.66
  Top 1.016: C25.1 arc90 54.64,51.66 54.64,52.86 R13.2
  Route15 0.305: v58.9,54.45 arc-90 60.01,53.34 60.01,52.55 arc90 61.75,50.8 63.02,50.8 arc90 64.14,51.91 64.14,53.34 arc-90 65.41,54.61 66.2,54.61 arc-90 67.94,52.86 67.94,48.9 arc90 68.9,47.94 v70.17,47.94
  Bottom 0.305: v70.17,47.94 arc90 71.99,46.12 v74.71,46.12
RESET  (via drill 0.3)
  Top 0.305: U1.8 arc90 70.04,47.31 68.1,47.31 arc-90 66.2,49.21
  Top 0.508: 66.2,49.21 v66.2,49.37
  Top 0.61: 28.23,36.35 C23.1 arc-90 30.08,40.1 | 30.1,40.1 arc90 30.96,40.96 arc-90 32.07,42.07 v33.81,42.07
  Top 0.813: C23.1 28.26,38.28 R1.1 30.08,40.1 30.1,40.1 | 28.23,36.35 SW2.B' SW2.B
  Route15 0.508: v33.81,42.07 arc90 34.61,42.86 34.61,46.67 arc-90 37.31,49.37 v66.2,49.37
RX
  Top 0.508: U1.30 73.98,32.54 arc90 74.77,31.75 arc-90 76.36,30.16 76.36,29.53 arc90 77.79,28.1 R23.1
  Top 1.27: R22.2 R23.1
  pour Top (no thermals): 74.77,27.62 77.95,27.62 77.95,28.57 77.64,28.57 77.64,28.57 77.63,28.57 77.62,28.57 77.61,28.58 77.45,28.59 77.44,28.59 77.44,28.59 77.43,28.59 77.42,28.6 77.26,28.64 77.26,28.64 77.25,28.64 77.24,28.64 77.24,28.65 77.09,28.72 77.08,28.72 77.07,28.72 77.07,28.73 77.06,28.73 76.93,28.83 76.92,28.83 76.91,28.83 76.91,28.84 76.9,28.85 76.79,28.96 76.78,28.96 76.78,28.97 76.77,28.98 76.77,28.98 76.67,29.12 76.67,29.12 76.67,29.13 76.66,29.14 76.66,29.14 76.59,29.29 76.59,29.3 76.58,29.31 76.58,29.31 76.58,29.32 76.54,29.48 76.54,29.48 76.53,29.49 76.53,29.5 76.53,29.51 76.52,29.69 76.2,29.69 76.19,29.54 76.19,29.53 76.19,29.52 76.18,29.51 76.18,29.51 76.15,29.37 76.15,29.37 76.14,29.36 76.14,29.35 76.14,29.35 76.08,29.22 76.08,29.22 76.07,29.21 76.07,29.2 76.06,29.2 75.99,29.09 75.98,29.08 75.98,29.07 75.97,29.07 75.97,29.06 75.87,28.97 75.87,28.96 75.86,28.96 75.85,28.95 75.85,28.95 75.74,28.87 75.73,28.86 75.72,28.86 75.72,28.86 75.71,28.86 75.59,28.8 75.58,28.79 75.57,28.79 75.57,28.79 75.56,28.79 75.43,28.75 75.42,28.75 75.41,28.75 75.4,28.75 75.4,28.75 75.26,28.74 75.26,28.73 75.25,28.73 75.24,28.73 75.23,28.73 74.77,28.73
RX-CO2
  Top 0.406: R37.2 arc-90 31.75,25.88 31.75,26.67 | R4.1 arc-90 31.75,28.61 31.75,26.83 31.75,26.67 | 31.75,26.67 arc90 32.54,25.88
  Top 0.813: R4.1 31.31,26.32 arc90 R37.2
RX-VER  (via drill 0.35)
  Top 0.406: R23.2 R25.2
  Top 0.508: v76.99,26.83 77.78,26.83 arc-90 R25.2 arc-90 78.11,25.88 77.79,25.88 77.79,26.04 arc90 v76.99,26.83
  Route15 0.508: v74.14,29.53 74.14,31.91 arc90 72.23,33.81 71.75,33.81 arc-90 69.37,36.2 69.37,38.73 arc90 66.83,41.27 66.67,41.27 arc-90 64.61,43.34 64.61,43.66 arc90 62.87,45.4 62.23,45.4 61.75,45.88 arc90 60.64,46.99 44.13,46.99 arc90 43.34,46.2 arc-90 42.39,45.24 v37.94,45.24
  Bottom 0.508: v37.94,45.24 33.11,45.24 arc-90 SV1.4 | v74.14,29.53 75.88,29.53 arc-90 76.99,28.42 v76.99,26.83
  pour Bottom (no thermals): 32.39,45.09 34.45,45.09 34.45,45.4 34.36,45.41 34.35,45.41 34.34,45.41 34.34,45.42 34.33,45.42 34.26,45.44 34.25,45.45 34.24,45.45 34.24,45.45 34.23,45.46 34.16,45.5 34.16,45.5 34.15,45.51 34.15,45.51 34.14,45.52 34.09,45.57 34.08,45.58 34.08,45.58 34.07,45.59 34.07,45.59 34.03,45.66 34.02,45.67 34.02,45.67 34.02,45.68 34.01,45.69 33.99,45.76 33.99,45.77 33.98,45.77 33.98,45.78 33.98,45.79 33.97,45.86 33.96,45.95 33.94,46.02 33.9,46.08 33.85,46.13 33.79,46.16 33.73,46.19 33.65,46.2 32.07,46.2 32.07,45.4 32.08,45.33 32.1,45.26 32.14,45.2 32.19,45.15 32.25,45.12 32.31,45.09
S$1
  Top 0.254: 80,22 78,22
S$2
  Top 0.2: 0,22 2,22
SCK
  Top 0.406: 55,24.45 arc-90 57.54,26.99 63.5,26.99 arc90 64.61,28.1 64.61,31.25 arc-45 64.76,31.61 67.27,34.12 arc-45 67.63,34.27 U1.24 | 55,24.45 IC1.4 54.61,24.06 | 49.78,26.45 50.39,26.45 arc-90 51.44,25.4 arc90 52.77,24.06 54.61,24.06 | 49.78,26.45 49.21,26.45 49.21,25.88 | U5.5 49.21,25.24 | 49.21,25.24 49.21,25.88 | 54.61,24.06 arc90 55,24.45 | 49.78,26.45 arc90 49.21,25.88 | 49.21,25.24 arc90 48.58,25.88 48.58,26.55 R14.1
SDI
  Top 0.254: IC1.3
  Top 0.305: U5.2 49.21,22.23 arc90 49.69,21.75
  Top 0.406: U1.25 69.98,26.96 arc-90 69.22,26.19 57.94,26.19 arc90 56.2,24.45 arc-90 IC1.3 | IC1.3 53.27,23.26 arc90 52,21.99 R20.1 52,21.75 49.69,21.75
TASTER  (via drill 0.3)
  Top 0.305: U1.9 arc90 69.87,46.67 67.94,46.67 arc-90 65.41,49.21
  Top 0.508: R15.1 19.37,50.64 arc90 20.8,52.07 arc-90 23.27,54.54 v29.21,54.54 | 65.41,49.21 v65.41,51.28
  Top 1.016: C21.1 R15.1
  Route15 0.508: v65.41,51.28 arc-90 64.29,50.16 56.52,50.16 arc-90 55.4,51.28 arc90 54.77,51.91 43.18,51.91 arc-90 42.07,53.02 arc90 40.55,54.54 v29.21,54.54
TRIG-1
  Top 0.813: J2.3 62.35,7.98 arc90 61.12,9.21 arc-90 59.9,10.43 R33.2
TRIG-2
  Top 0.508: 13.34,17.94 13.65,17.94 arc-90 14.45,17.14 15.56,17.14 15.56,17.78 15.41,17.78 | Q5.3 arc-90 15.41,17.78 | 14.62,17.94 arc90 14.78,17.78 15.41,17.78
  Top 0.813: Q5.3 arc90 14.62,17.94 13.34,17.94 R31.1 arc90 7.89,18.77 7.26,18.77 | J3.3 7.26,18.77 | 7.26,18.77 arc-90 8.26,17.78
TRIG-3
  Top 0.813: J4.3 9.01,27.98 arc-90 R16.1 | R16.1 arc-90 10.63,29.52 arc90 R16.1
  Top 1.016: R16.1 arc-90 10.63,29.52
  Top 1.27: R16.1 arc-90 10.63,29.52 Q1.3
TRIG-4
  Top 0.813: J5.3 34.01,5.56 arc90 32.58,6.99 31.43,6.99 arc-90 29.22,9.2 | 29.22,9.2 Q2.3 | Q2.3 27.26,10.64 arc-90 R18.1 | 29.22,9.2 arc90 28.26,10.16 27.3,10.16 27.3,11.11 28.75,11.11 arc-90 Q2.3
TRIGGER-4-3V3  (via drill 0.3)
  Top 0.508: v62.71,42.07 63.5,42.07 arc90 63.98,42.55 arc-90 64.5,43.06 U1.13 | 50.64,29.69 v54.93,29.69
  Top 0.813: 35.72,11.59 v35.88,11.59 | v38.58,18.73 40.16,18.73 arc90 42.7,21.27 42.7,26.83 arc-90 45.56,29.69 50.64,29.69
  Top 1.016: Q2.2 R19.1 35.72,11.59
  Route2 0.813: v35.88,11.59 35.88,16.19 arc-90 38.42,18.73 v38.58,18.73
  Route15 0.508: v62.71,42.07 arc-90 60.96,40.32 58.74,40.32 arc90 55.88,37.47 55.88,30.32 arc-90 55.24,29.69 v54.93,29.69
TX  (via drill 0.3, 0.35)
  Top 0.406: U1.31 arc90 75.7,32.25 77.63,32.25 v77.79,32.09
  Top 0.508: v77.15,22.86 77.15,23.97 76.83,24.29 arc90 R24.2
  Top 1.27: R24.2 R25.1
  Route15 0.508: v77.79,32.09 77.79,23.5 v77.15,22.86
  pour Top (no thermals): 77.08,22.55 77.15,22.54 77.22,22.55 77.29,22.57 77.35,22.61 77.4,22.66 77.44,22.72 77.46,22.79 77.47,22.86 77.47,23 77.47,23.01 77.47,23.02 77.47,23.03 77.47,23.03 77.48,23.13 77.48,23.14 77.48,23.14 77.48,23.15 77.49,23.16 77.51,23.25 77.51,23.26 77.52,23.26 77.52,23.27 77.53,23.27 77.57,23.36 77.57,23.37 77.58,23.37 77.58,23.38 77.59,23.38 77.65,23.46 77.65,23.46 77.66,23.47 77.66,23.47 77.67,23.48 77.74,23.54 77.75,23.54 77.75,23.55 77.76,23.55 77.77,23.55 77.85,23.6 77.85,23.6 77.86,23.61 77.87,23.61 77.88,23.61 77.97,23.64 77.97,23.64 77.98,23.64 77.99,23.64 78,23.64 78.09,23.65 78.09,23.65 78.11,23.65 78.12,23.65 78.12,23.65 79.06,23.65 79.1,23.66 79.14,23.68 79.17,23.7 79.19,23.73 79.21,23.77 79.22,23.81 79.22,24.77 79.21,24.81 79.19,24.84 79.17,24.88 79.14,24.9 79.1,24.92 79.06,24.92 74.77,24.92 74.73,24.92 74.69,24.9 74.66,24.88 74.63,24.84 74.62,24.81 74.61,24.77 74.61,23.81 74.62,23.77 74.63,23.73 74.66,23.7 74.69,23.68 74.73,23.66 74.77,23.65 76.18,23.65 76.19,23.65 76.2,23.65 76.21,23.65 76.21,23.65 76.31,23.64 76.32,23.64 76.32,23.64 76.33,23.64 76.34,23.64 76.43,23.61 76.44,23.61 76.44,23.61 76.45,23.6 76.46,23.6 76.54,23.55 76.55,23.55 76.55,23.55 76.56,23.54 76.56,23.54 76.64,23.48 76.64,23.47 76.65,23.47 76.65,23.46 76.66,23.46 76.72,23.38 76.72,23.38 76.73,23.37 76.73,23.37 76.74,23.36 76.78,23.27 76.78,23.27 76.79,23.26 76.79,23.26 76.79,23.25 76.82,23.16 76.82,23.15 76.82,23.14 76.83,23.14 76.82,23.13 76.83,23.03 76.83,23.03 76.83,23.02 76.84,23.01 76.83,23 76.83,22.86 76.84,22.79 76.87,22.72 76.9,22.66 76.95,22.61 77.01,22.57
TX-CO2
  Top 1.016: 29.35,22.69 arc90 R35.2
  Top 1.27: R3.1 29.35,22.69
TX-VER  (via drill 0.35)
  Top 0.508: R24.1 arc90 75.88,25.72 v76.83,25.72 arc-90 75.96,26.59 75.56,26.2 arc90 R22.1
  Route15 0.508: v38.3,48.38 52.7,48.38 arc-45 53.59,48.01 arc45 54.13,47.78 63.5,47.78 arc-90 65.56,45.72 65.56,44.13 arc90 67.15,42.55 70.33,42.55 arc-90 71.6,41.27 71.6,37.31 arc90 72.71,36.2 75.88,36.2 arc-90 77.31,34.77 77.31,33.18 arc-90 76.36,32.23 76.36,26.19 arc90 v76.83,25.72
  Bottom 0.508: SV1.3 38.24,48.35 arc-90 38.26,48.34 arc90 v38.3,48.38
VBUS  (via drill 0.3, 0.3 pad 0.55, 1 pad 1)
  Top 0.508: v8.89,41.12 8.89,41.27 v9.21,41.59 | v11.75,41.59 11.75,41.75 v11.43,42.07 v10.79,42.07 v10.16,42.07 v9.53,42.07 9.21,41.75 | v11.75,41.59 11.75,41.43 v11.43,41.12 v10.79,41.12 v10.16,41.12 v9.53,41.12 v8.89,41.12 | v11.75,41.59 v11.11,41.59 v10.48,41.59 v9.84,41.59 v9.21,41.59 | 9.21,41.75 v9.21,41.59 | v9.21,41.59 arc-90 9.07,41.45 8.91,41.45 | 8.55,41.45 8.91,41.45 | 8.91,41.45 arc90 9.21,41.75 | 8.55,41.45 arc-90 v8.89,41.12 | 8.73,36.67 v8.89,36.67 v9.53,36.67 v10.16,36.67 v10.79,36.67 | 8.73,36.67 arc-90 v9.21,36.2 v9.84,36.2 v10.48,36.2 v11.11,36.2 v11.11,37.15 v10.48,37.15 v9.84,37.15 v9.21,37.15 arc-90 8.73,36.67 | 66.75,13.42 66.99,13.65 v66.99,14.45 v66.99,15.08 66.99,15.56 | 66.75,13.42 R21.2 | 66.99,15.56 v66.99,15.72 | v66.99,16.35 v66.99,15.72 | v66.99,16.35 66.52,16.35 | 66.52,16.35 v66.04,16.35 | v66.04,16.35 v66.04,15.72 v66.04,15.08 v66.04,14.45 66.04,13.49 | v66.99,16.35 arc-90 67.53,16.89 | 67.53,16.89 68.17,16.89 | 66.52,16.35 66.52,13.65 arc90 66.75,13.42 | v66.99,15.72 arc-90 68.17,16.89 | 68.17,16.89 68.58,16.89 | D1.1 arc-90 68.13,16.35 67.79,16.35 | 67.79,16.35 v66.99,16.35 | 67.79,16.35 arc90 66.99,15.56 | v66.04,16.35 arc-90 66.58,16.89 | D1.1 68.58,16.89 | 67.53,16.89 67.31,16.89 | 67.31,16.89 66.83,16.89 | 66.83,16.89 66.58,16.89 | 66.58,16.89 arc90 66.52,16.83 66.52,16.35 | 66.83,16.89 66.83,16.67 arc-90 66.52,16.35 | C5.1 arc90 68.42,19.92 | 68.42,19.68 68.42,19.92 | C5.1 arc-90 69.69,19.92 | 69.69,19.92 v69.69,19.53 | v68.42,19.53 68.74,19.53 | 68.74,19.53 v69.06,19.53 | v69.06,19.53 v69.69,19.53 | 69.06,19.84 v69.06,19.53 | C5.1 69.06,20.32 | 69.06,20.32 69.06,19.84
  Top 0.508: 69.06,19.84 arc-90 68.74,19.53 | v68.42,19.53 68.42,19.68 | 68.42,19.68 arc-90 69.06,20.32 | v69.06,19.53 68.58,19.53 arc-90 68.42,19.68 | 68.42,19.92 69.69,19.92 | v68.42,19.53 68.42,19.21 | 68.42,19.21 68.42,18.73 | 68.42,18.73 68.42,18.26 | 68.42,18.26 68.42,18 | 67.31,16.89 arc90 68.42,18 | v69.06,19.53 69.06,19.21 | 69.06,19.21 69.06,18.89 | 69.06,17.37 69.06,17.78 | 69.06,17.78 69.06,18.26 | 69.06,18.26 69.06,18.89 | D1.1 arc90 69.06,17.28 69.06,17.37 | 69.06,19.21 68.42,19.21 | 69.06,18.89 arc-90 68.9,18.73 68.42,18.73 | 69.06,18.89 arc90 68.42,18.26 | 69.06,18.26 68.42,18.26 | 69.06,17.78 68.64,17.78 arc-90 68.42,18 | 69.06,17.37 arc90 68.42,18 | 68.42,18 arc-90 68.58,17.84 68.58,16.89 | v69.69,19.53 69.69,19.05 | 69.69,19.05 69.69,18.57 | 69.69,18.57 69.69,18.26 | 69.69,18.26 69.69,17.91 | D1.1 arc90 69.69,17.91 | 69.69,19.05 69.22,19.05 arc-90 69.06,19.21 | 69.69,19.05 arc-90 69.53,18.89 69.06,18.89 | 69.69,18.57 69.37,18.57 arc90 69.06,18.26 | 69.69,18.26 69.06,18.26 | 69.6,17.91 69.19,17.91 arc90 69.06,17.78 | 69.69,17.91 69.6,17.91 | 69.6,17.91 arc90 69.06,17.37 | C12.1 arc90 32.54,19.61 | v32.54,18.89 32.54,19.21 | 32.54,19.21 32.54,19.61 | C12.1 arc-90 33.81,19.76 33.81,19.53 | 33.81,19.53 33.81,19.21 | 33.81,19.21 v33.81,18.89 | v33.81,18.89 v33.18,18.89 | v33.18,18.89 32.86,18.89 | v32.38,17.94 32.38,17.61 | 32.38,17.61 arc90 D5.1 | v32.38,17.94 arc90 32.54,18.1 32.54,18.41 | 32.54,18.41 v32.54,18.89 | D5.1 33.11,16.99 | 33.11,16.99 33.11,17.46 | 33.11,17.46 33.11,18.82 arc-90 v33.18,18.89 | v33.81,18.89 33.81,17.69 | 33.81,17.69 arc-90 33.11,16.99 | v33.81,18.26 33.5,18.26 | 33.5,18.26 32.7,18.26 | 32.7,18.26 arc-90 32.54,18.41
  Top 0.508: v32.54,18.89 32.86,18.89 | 32.86,18.89 arc-90 33.5,18.26 | 32.86,18.89 32.86,18.41 arc-90 32.7,18.26 | v32.38,17.94 33.56,17.94 arc-90 33.81,17.69 | 33.81,17.69 arc-90 33.59,17.46 33.11,17.46 | 33.11,17.46 32.54,17.46 arc-90 32.38,17.61 | v32.38,17.94 32.07,17.94 | 32.07,17.94 v31.59,17.94 | v31.59,17.94 v31.59,17.3 | v31.59,17.3 31.59,16.99 | 31.59,16.99 v31.59,16.67 32.79,16.67 arc90 33.11,16.99 | v31.59,17.3 31.91,17.3 | 31.91,17.3 32.23,17.3 | 32.23,17.3 32.7,17.3 arc-90 D5.1 | 31.59,16.99 31.91,16.99 arc90 32.23,17.3 | 31.91,17.3 arc90 32.07,17.46 32.07,17.94 | v31.59,17.94 arc90 v32.54,18.89 | 32.86,18.89 arc90 33.26,19.29 | C12.1 33.26,19.53 | 33.26,19.53 33.26,19.29 | 33.26,19.29 arc-90 32.86,18.89 | 32.54,19.61 33.17,19.61 | 33.17,19.61 arc-90 33.26,19.53 | 33.17,19.61 33.73,19.61 arc-90 33.81,19.53 | 33.81,19.21 33.33,19.21 arc-90 33.26,19.29 | 33.26,19.29 32.62,19.29 arc90 32.54,19.21 | J6.B4_A9 arc-90 7.31,36.67 8.73,36.67 | J6.A4_B9 8.55,41.45